# Altium PCB ArduVape PCB.PcbDoc
Units mil, origin at the board's own origin, x right, y up, seen from the top; angles counter-clockwise.
Board outline 1000 x 2000 mil, 2 copper layers (Top Layer, Bottom Layer); 9 components, 11 nets, 40 pads, 0 vias.
Unrouted connection lines stored in the file: 26.
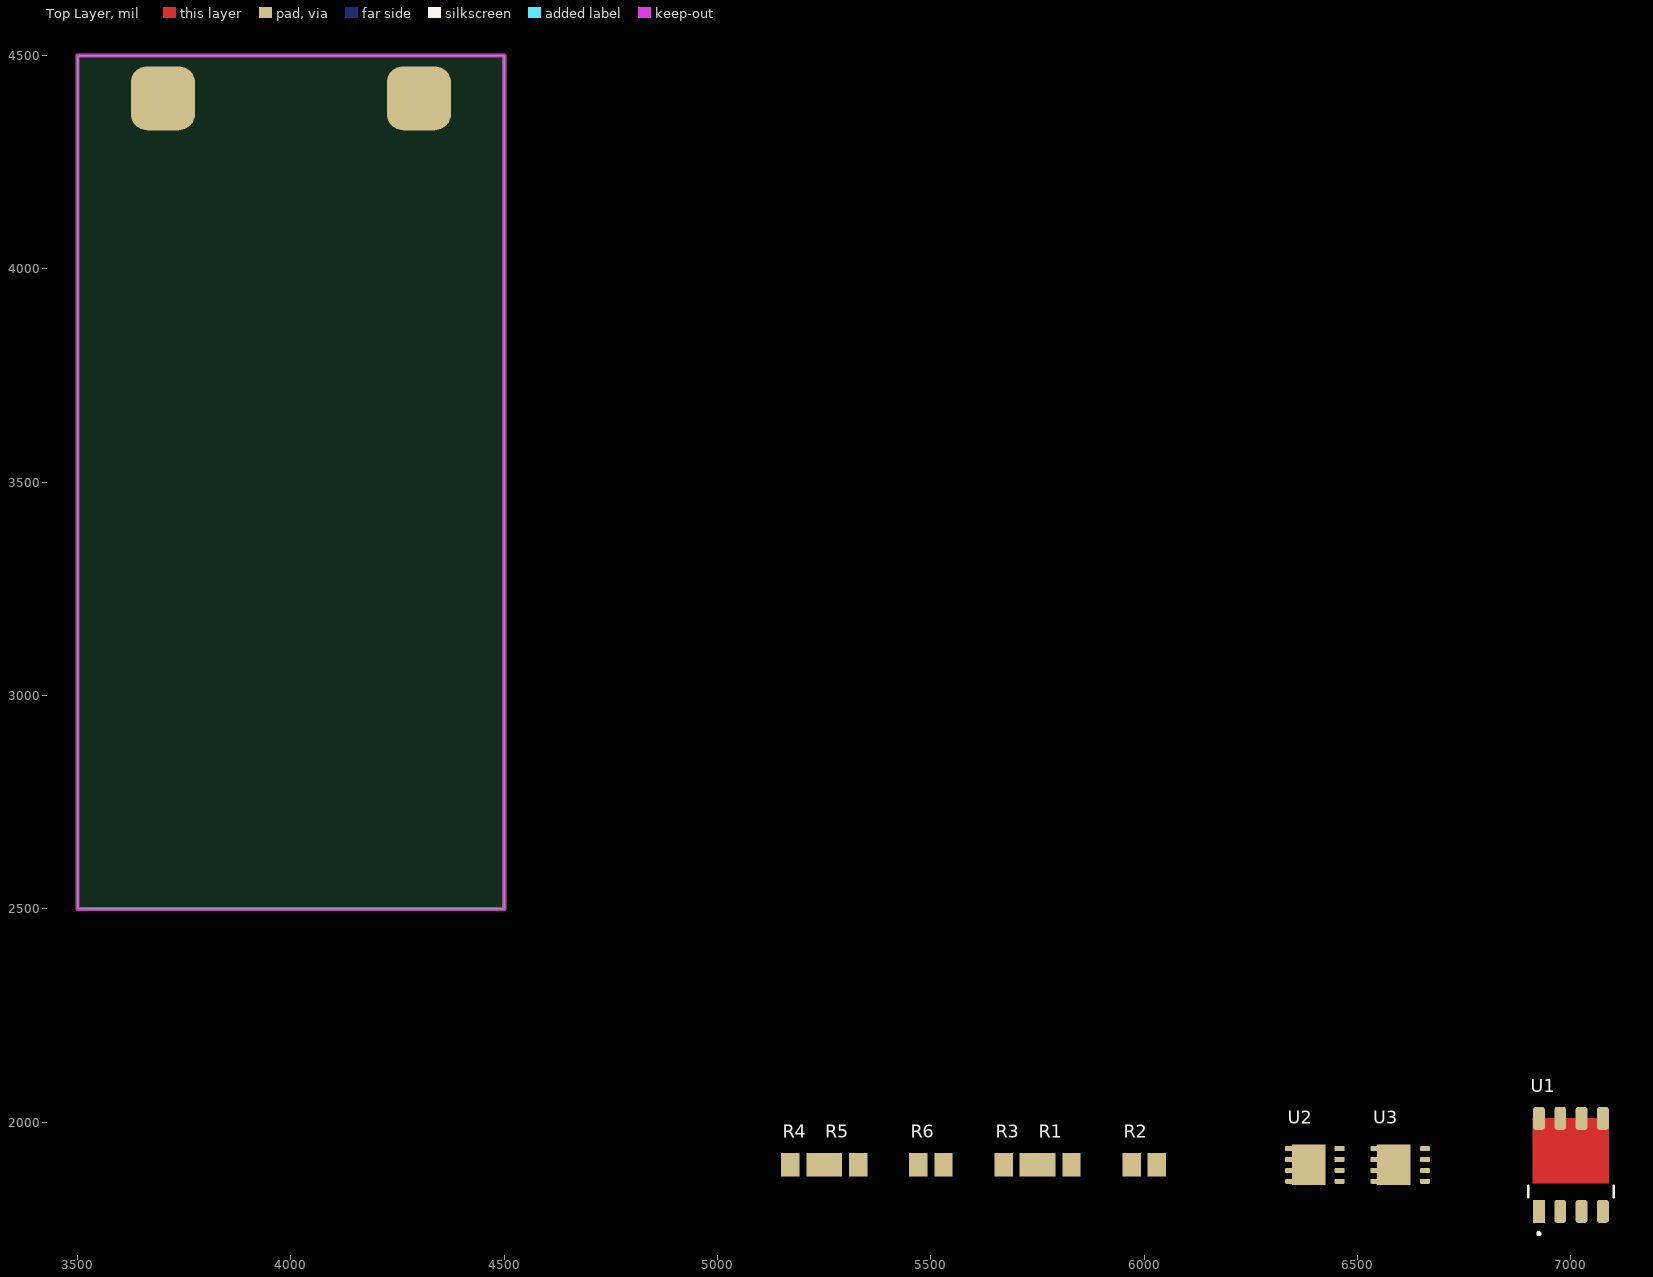
[diagram p0: Top Layer view]
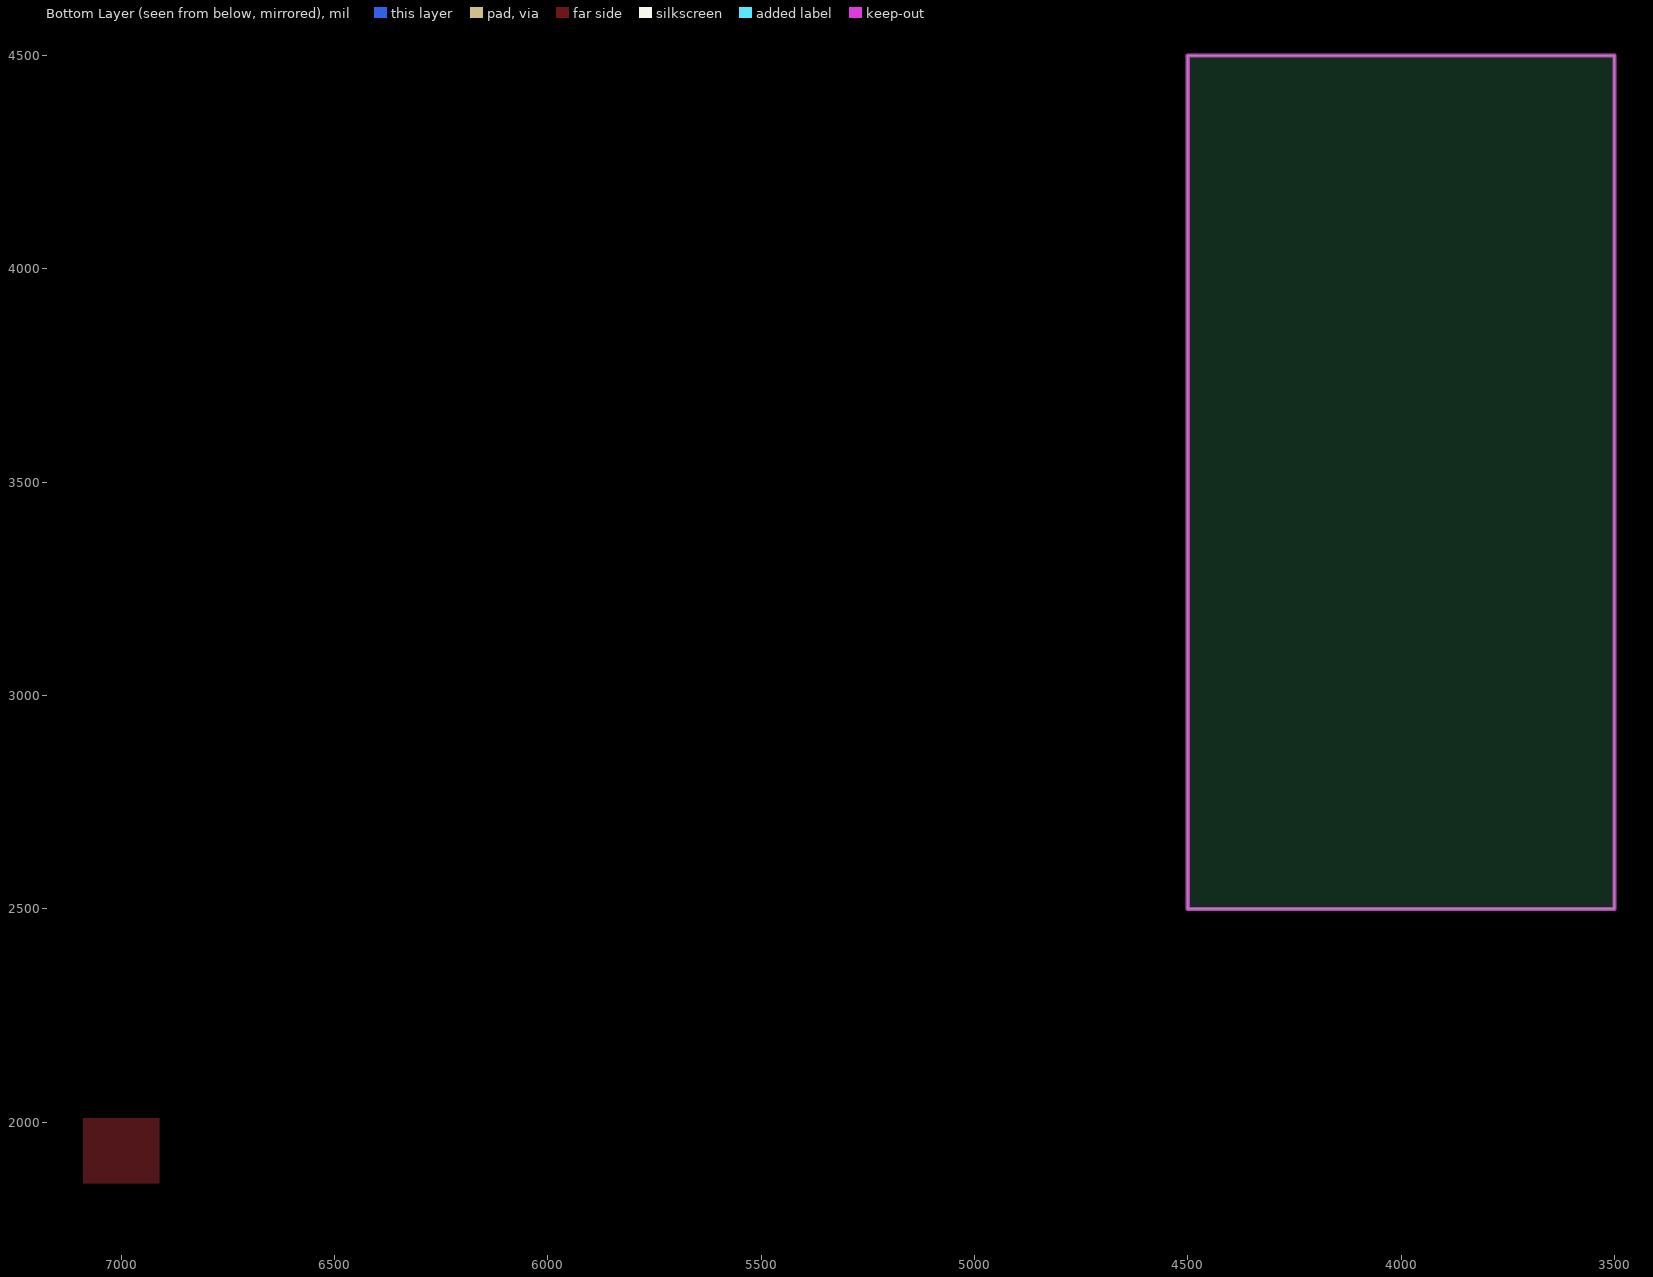
[diagram p1: Bottom Layer view, seen from below]

## Layer stack, top to bottom
Top Solder: solder mask 0.4, Solder Resist, Dk 3.5
Top Layer: signal copper 1.4
Dielectric 1: dielectric 12.6, FR-4, Dk 4.8
Bottom Layer: signal copper 1.4
Bottom Solder: solder mask 0.4, Solder Resist, Dk 3.5

## Board outline
3500,2500 4500,2500 4500,4500 3500,4500

## Design rules (kind name [scope] priority, off if disabled: settings)
Clearance [All] p1: gap=10
PolygonConnect [All] p1: connectstyle=Relief reliefconductorwidth=10 reliefentries=4 polygonreliefangle="90 Angle" airgapwidth=10
RoutingVias [All] p1: holewidth=28 width=50 viastyle="Through Hole" minholewidth=28 minwidth=50 maxholewidth=28 maxwidth=50
SolderMaskExpansion [All] p1: expansion=4
Width [All] p1: maxlimit=10 minlimit=10 preferedwidth=10
29 further rules are at their usual default settings.

## Components (designator, comment, footprint, x,y, rotation, side; value= is the part's Value field where it differs from the comment)
R1 "1K Ohm Resistor" Res0805 5800,1900 r0 top
R2 "1K Ohm Resistor" Res0805 6000,1900 r0 top
R3 "1K Ohm Resistor" Res0805 5700,1900 r0 top
R4 "10K Ohm Resistor" res0805 5200,1900 r0 top
R5 "10K Ohm Resistor" res0805 5300,1900 r0 top
R6 "10K Ohm Resistor" res0805 5500,1900 r0 top
U1 "CSD18503Q5A" "SON 5mmx6mm" 7000,1900 r90 top
U2 "CSD25402Q3A" "SON 3.3 x 3.3" 6400,1900 r0 top
U3 "CSD25402Q3A" "SON 3.3 x 3.3" 6600,1900 r0 top

## Footprints (in the part's own frame and the unit in brackets; to place one, negate y for a bottom-side part, rotate by r counter-clockwise, add the part's x,y. Pads: shape width x height; smd on the part's side, far side on the other; paste and mask are expansions set on the pad)
Res0805 [mm] "Chip Resistor, Body 2.0x1.3mm, IPC High Density"
  rect 1.1x1.4 smd: 1(-0.75,0) 2(0.75,0)
  body extent -1.15,-0.67 1.15,0.68, height 0.76
res0805 [mm] "Chip Resistor, Body 2.0x1.3mm, IPC High Density"
  rect 1.1x1.4 smd: 1(-0.75,0) 2(0.75,0)
  body extent -1.15,-0.67 1.15,0.68, height 0.76
"SON 3.3 x 3.3" [mm]
  rrect50% 0.6x0.3 smd: 1(1.475,0.975) 2(1.475,0.325) 3(1.475,-0.325) 4(1.475,-0.975) 5(-1.475,-0.975) 6(-1.475,-0.325) 7(-1.475,0.325) 8(-1.475,0.975)
  rect 2x2.4 smd: 2(-0.375,0)
  body extent -1.68,-1.68 1.68,1.68, height 1
"SON 5mmx6mm" [mm] "SON 5mmx6mm"
  rect 1.372x0.71 smd paste-0.673: 1(-2.77,1.905)
  rrect50% 1.372x0.71 smd paste-0.673: 2(-2.77,0.635) 3(-2.77,-0.635) 4(-2.77,-1.905) 5(2.77,-1.905) 6(2.77,-0.635) 7(2.77,0.635) 8(2.77,1.905)
  Top Layer region: 2.765,-2.26 2.765,2.26 -1.085,2.26 -1.085,-2.26
  Top Layer region: 2.765,-2.26 2.765,2.26 -1.085,2.26 -1.085,-2.26
  silkscreen extent -4.17,-2.55 -1.25,2.55, body extent -3,-2.41 3,2.49, height 1

## Part data
R1 R2 R3: library part "1K 0805", "1K Ohm Resistor 0805"
R4 R5 R6: library part "10K 0805", "10K Ohm Resistor 0805"
U1: "Power MOSFET 40V 100A"
U2 U3: "–20 V P-Channel NexFET™ Power MOSFET"

## Free pads (board coordinates)
  rrect50% 150x150 smd: CoilN(4300,4400) CoilP(3700,4400)

## Nets (pads, with @x,y where several pads share a name; then routed paths per layer and width w, separated by ;. In a path a pad name is that pad's centre, name@x,y a point inside that pad or via, vN(x,y) a via of type N, cw(c..) or ccw(c..) an arc to the next point about the centre after c; other vN are vias at no path point)
5V: U3.5 U3.6 U3.7 U3.8
"BATTERY IN": R5.1 R6.1 U2.5 U2.6 U2.7 U2.8
COILFIREGATE: R3.2
COILNEGATIVE: pad.CoilN U1.5 U1.6 U1.7 U1.8
COILPOS: pad.CoilP U2.1 U2.2 U2.3 U3.1 U3.2 U3.3
COILPOS5V: R2.2
COILPOSBATT: R1.2
GND: R4.1 U1.1 U1.2 U1.3
NetR1_1: R1.1 R5.2 U2.4
NetR2_1: R2.1 R6.2 U3.4
NetR3_1: R3.1 R4.2 U1.4

## Keep-outs
Keep-Out Layer:
  the board outline again, w10